# Altium PCB msr50.PcbDoc (part 1 of 8)
Units mil, origin at the board's own origin, x right, y up, seen from the top; angles counter-clockwise.
Board outline 3925 x 3925 mil, 2 copper layers (TopLayer, BottomLayer); 109 components, 122 nets, 846 pads, 52 vias.
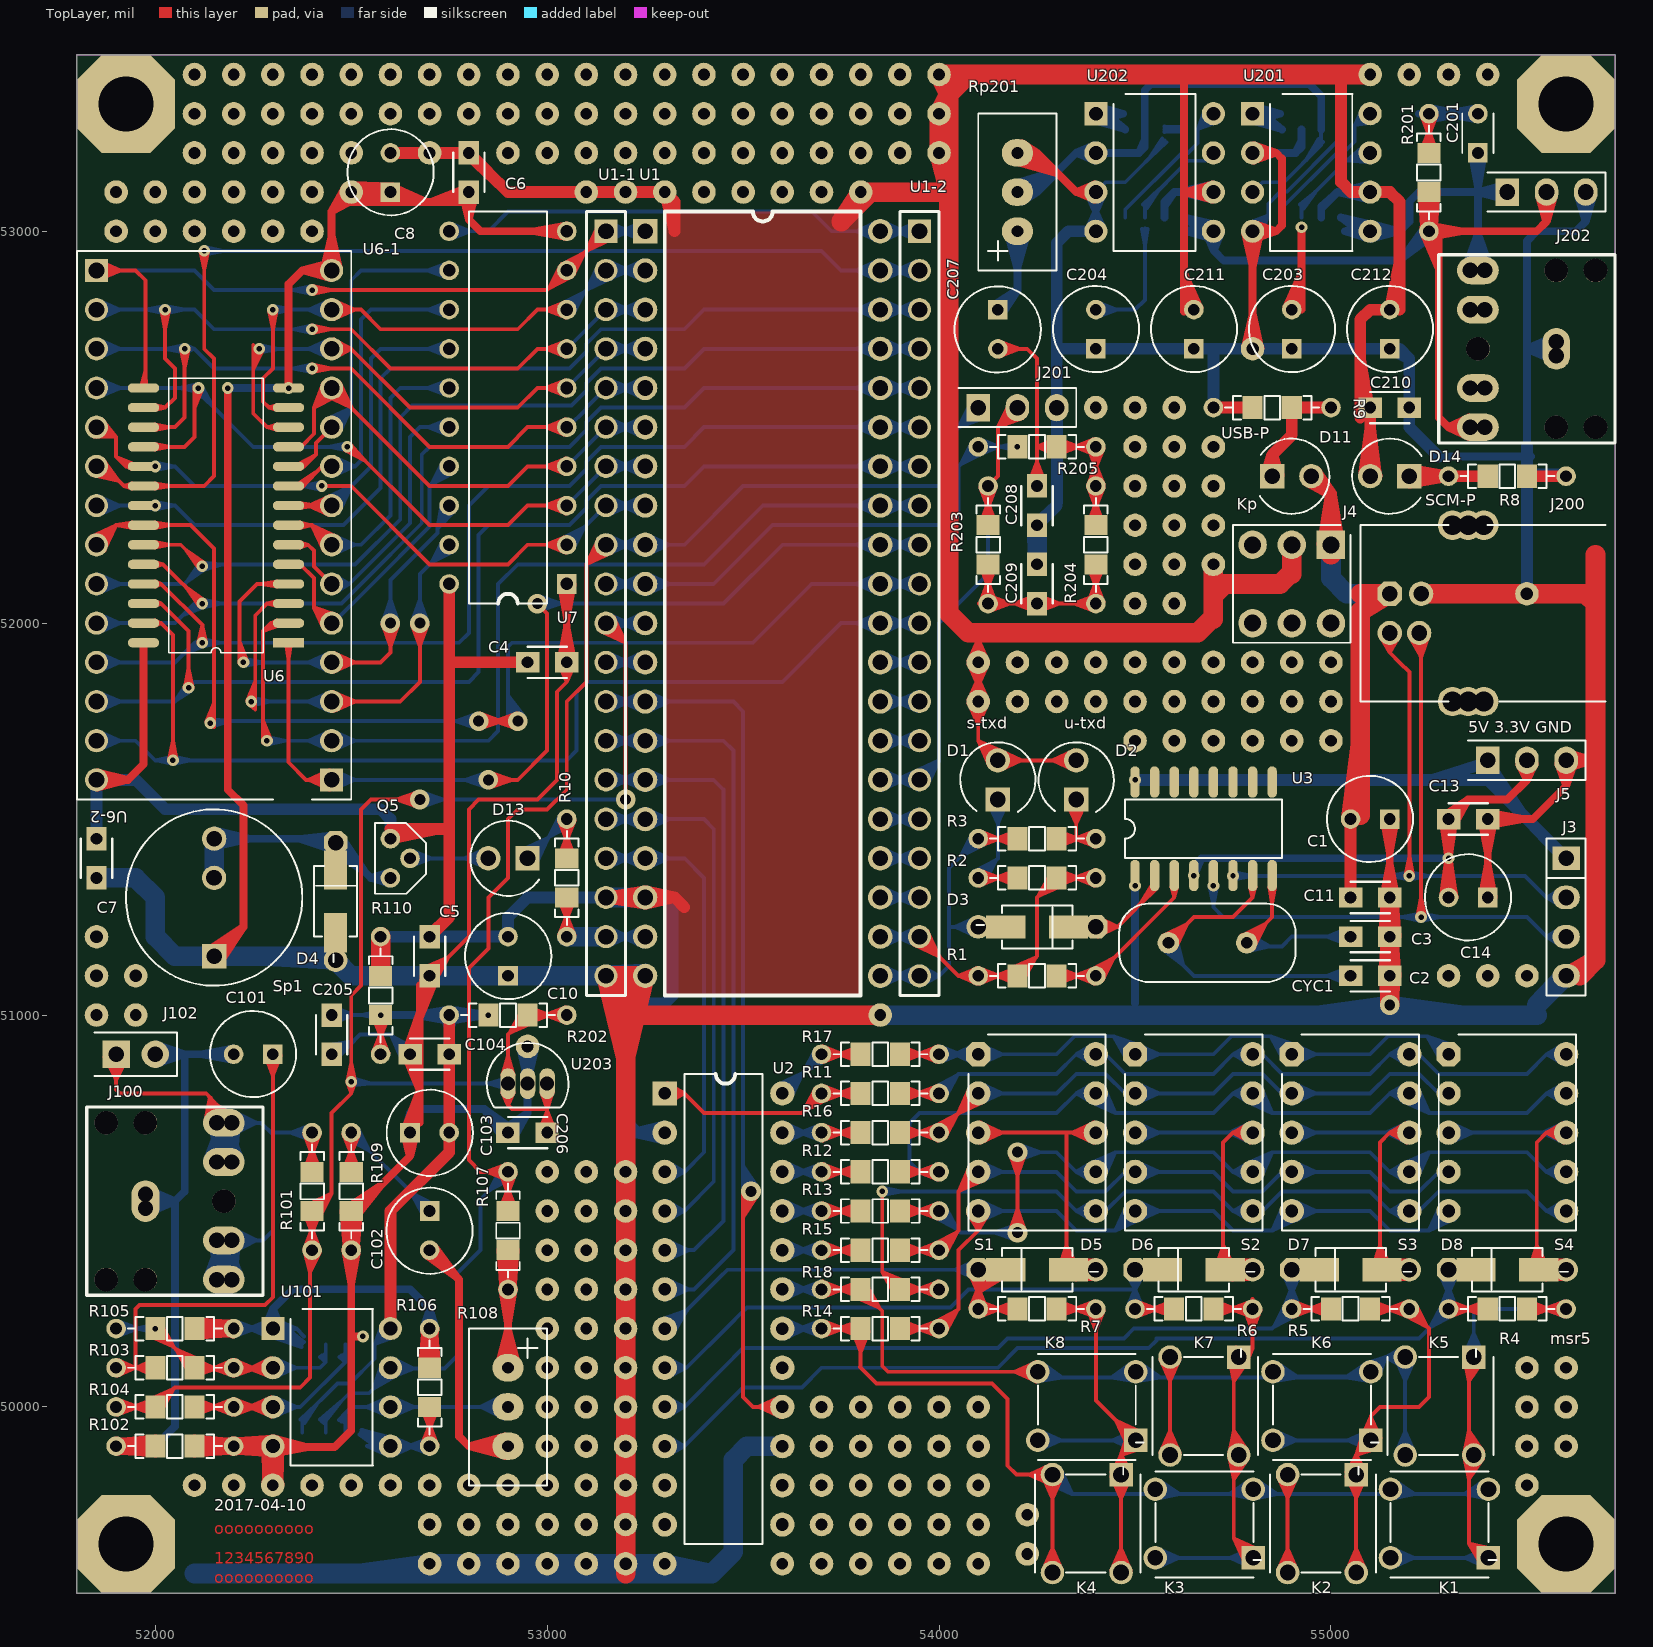
[diagram p0: TopLayer view]
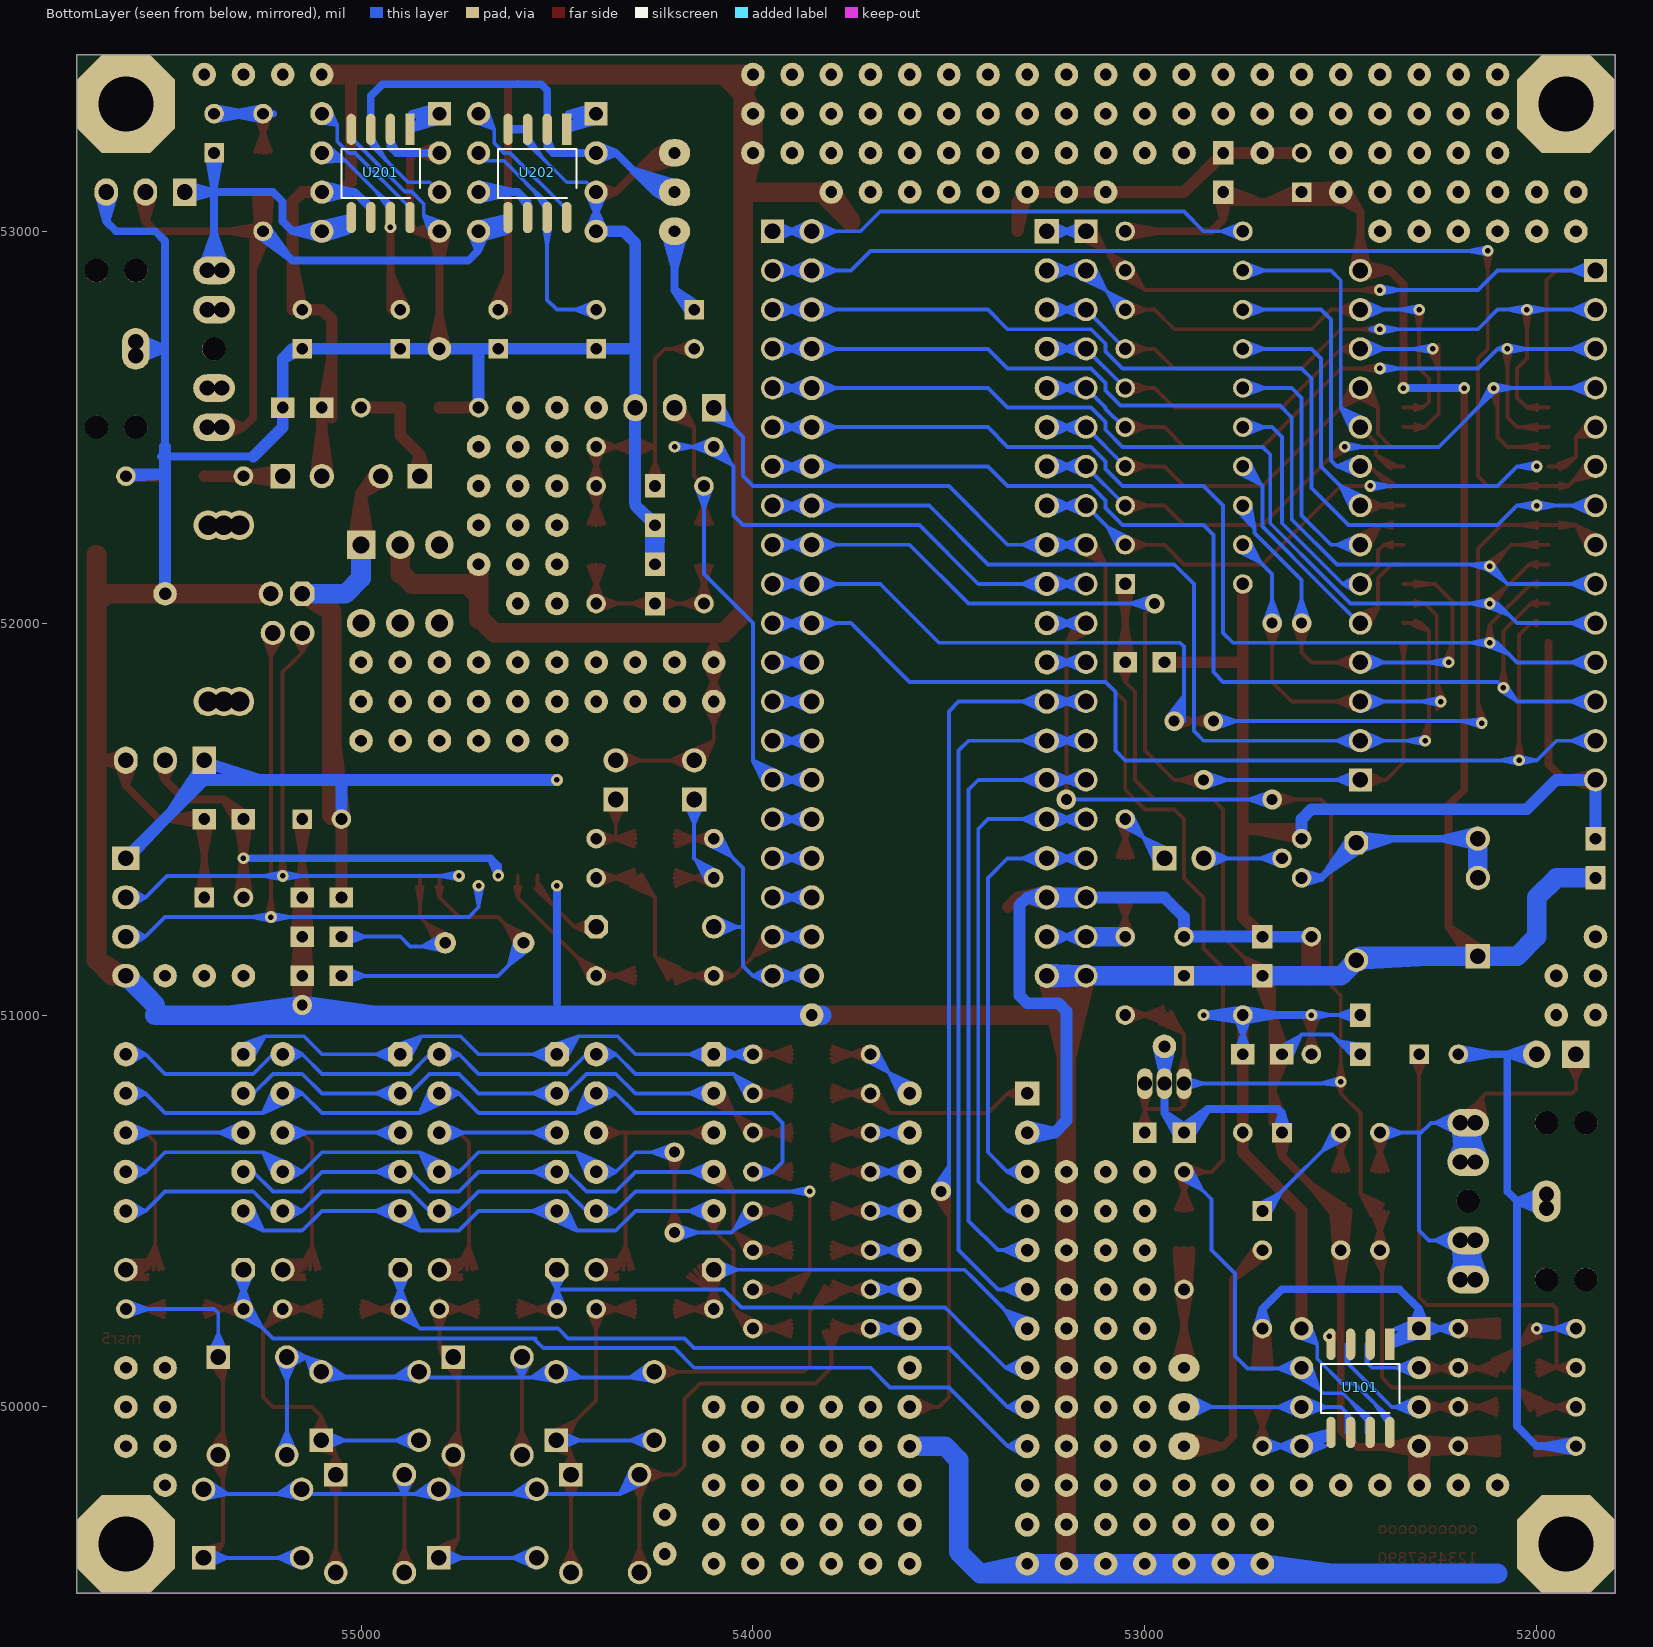
[diagram p1: BottomLayer view, seen from below]

## Layer stack, top to bottom
TopLayer: signal copper 1.4
Dielectric: dielectric 12.6, FR-4, Dk 4.8
BottomLayer: signal copper 1.4

## Board outline
51800,53450 55725,53450 55725,49525 51800,49525

## Design rules (kind name [scope] priority, off if disabled: settings)
AssemblyTestPointUsage [All] p1 off:
AssemblyTestpoint [All] p1 off: testpointundercomponent=TRUE minsize=40 maxsize=100 preferedsize=60 minholesize=0 maxholesize=40 preferedholesize=32 testpointgrid=1 usegrid=TRUE gridtolerance=0.01 allowsidetop=TRUE allowsidebottom=TRUE
Clearance [All] p1: gap=10
ComponentClearance [All] p1 off: gap=10 collisioncheckmode=3 verticalgap=10 showdistances=FALSE
DiffPairsRouting [All] p1 off: maxlimit=10 minlimit=10 mostfreqgap=10 maxuncoupledlength=500
FabricationTestPointUsage TestPointUsage [All] p1 off: valid=0 allowmultiple=FALSE
FabricationTestpoint Testpoint [All] p1 off: side=3 testpointundercomponent=TRUE minsize=40 maxsize=100 preferedsize=60 minholesize=20 maxholesize=40 preferedholesize=32 testpointgrid=1 allowsidetop=TRUE allowsidebottom=TRUE usegrid=TRUE gridtolerance=0.01
FanoutControl Fanout_BGA [IsBGA] p1 off: bgadir=Out bgaviamode=Centered fanoutstyle=Auto fanoutdirection=Alternating viagrid=1 // Fanout_BGA (Default Rule)
FanoutControl Fanout_LCC [IsLCC] p2 off: bgadir=Out bgaviamode=Centered fanoutstyle=Auto fanoutdirection=Alternating viagrid=1 // Fanout_LCC (Default Rule)
FanoutControl Fanout_SOIC [IsSOIC] p3 off: bgadir=Out bgaviamode=Centered fanoutstyle=Auto fanoutdirection=Alternating viagrid=1 // Fanout_SOIC (Default Rule)
FanoutControl Fanout_Small [(CompPinCount < 5)] p4 off: bgadir=Out bgaviamode=Centered fanoutstyle=Auto fanoutdirection=OutThenIn viagrid=1 // Fanout_Small (Default Rule)
FanoutControl Fanout_Default [All] p5 off: bgadir=Out bgaviamode=Centered fanoutstyle=Auto fanoutdirection=Alternating viagrid=1 // Fanout_Default (Default Rule)
Height [All] p1 off: minheight=0 maxheight=1000 prefheight=500
HoleToHoleClearance [All] p1 off: gap=10 allowstackedmicrovias=TRUE
LayerPairs [All] p1 off: enforce=TRUE
MinimumSolderMaskSliver [All] p1 off: minsoldermaskwidth=10
NetAntennae [All] p1 off: netantennaetolerance=0
PasteMaskExpansion [All] p1 off: expansion=0
PlaneClearance [All] p1 off: clearance=20
PlaneConnect [All] p1 off: planeconnectstyle=Relief reliefexpansion=20 reliefentries=4 reliefconductorwidth=10 reliefairgap=10
PolygonConnect [All] p1 off: connectstyle=Relief reliefconductorwidth=10 reliefentries=4 polygonreliefangle="90 Angle"
RoutingPriority [All] p1 off: routingpriority=0
RoutingVias [All] p1: holewidth=28 width=50 viastyle="Through Hole" minholewidth=28 minwidth=50 maxholewidth=28 maxwidth=50
SilkToSilkClearance [All] p1 off: silktosilkclearance=10
SilkscreenOverComponentPads [All] p1 off: minsilkscreentomaskgap=10
SolderMaskExpansion [All] p1 off: expansion=4
Width [All] p1: maxlimit=100 minlimit=10 preferedwidth=30 toplayer_prefwidth=10
Width Width_1 [All] p2 off: maxlimit=100 minlimit=10 preferedwidth=50
Width Width_2 [All] p3 off: maxlimit=100 minlimit=10 preferedwidth=30
6 further rules are at their usual default settings.

## Classes and differential pairs
component class msr502: C101 C102 C103 C104 C201 C203 C204 C205 C206 C207 C208 C209 C210 C211 C212 J100 J102 J200 J201 J202 R101 R102 R103 R104 R105 R106 R107 R108 R109 R110 R201 R202 R203 R204 R205 Rp201 U101 U201 U202 U203
component class msr501: C1 C2 C3 C4 C5 C6 C7 C8 C10 C11 C13 C14 CYC1 D1 D2 D3 D4 D5 D6 D7 D8 D11 D13 D14 J3 J4 J5 k1 k2 k3 k4 K5 K6 K7 K8 Kp Q5 R1 R2 R3 R4 R5 R6 R7 R8 R9 R10 R11 R12 R13 R14 R15 R16 R17 R18 R20 R? S1 S1_1 S2 S3 S4 S5 S6 S7 S8 Sp1 U1 U1-1 U1-2 U2 U3 U6 U6-1 U6-2 U7

## Components (designator, comment, footprint, x,y, rotation, side; value= is the part's Value field where it differs from the comment)
C1 "100u/16v" rb.1/.2 55100,51500 r0 top
C2 "CAP" CAP010805 55050,51100 r0 top
C3 "CAP" CAP010805 55050,51200 r0 top
C4 "104" CAP010805 52950,51900 r0 top
C5 "104" CAP010805 52700,51200 r270 top
C6 "104" CAP010805 52800,53200 r270 top
C7 "104" CAP010805 51850,51450 r270 top
C8 "100u/16v" rb.1/.2 52600,53150 r270 top
C10 "100u/16v" rb.1/.2 52900,51150 r270 top
C11 "104" CAP010805 55050,51300 r0 top
C13 "104" CAP010805 55300,51500 r0 top
C14 "10u/16v" rb.1/.2 55350,51300 r0 top
C101 "10u/16v" rb.1/.2 52250,50900 r0 top
C102 "10u/16v" rb.1/.2 52700,50450 r90 top
C103 "10u/16v" rb.1/.2 52700,50700 r180 top
C104 "104" CAP010805 52750,50900 r180 top
C201 "103" cap0.1 55375,53300 r270 top
C203 "10u/16v" rb.1/.2 54900,52750 r270 top
C204 "10u/16v" rb.1/.2 54400,52750 r270 top
C205 "104" CAP010805 52450,51000 r270 top
C206 "104" CAP010805 53000,50700 r180 top
C207 "10u/16v" rb.1/.2 54150,52750 r90 top
C208 "104" CAP010805 54250,52350 r270 top
C209 "104" CAP010805 54250,52050 r90 top
C210 "104" CAP010805 55100,52550 r0 top
C211 "10u/16v" rb.1/.2 54650,52750 r270 top
C212 "10u/16v" rb.1/.2 55150,52750 r270 top
CYC1 "12Mhz" cyc-rad 54784.66,51184.28 r180 top
D1 "LED" led-3 54150,51600 r270 top
D2 "LED" led-3 54350,51600 r270 top
D3 "sma03" smc03 54400,51225 r180 top
D4 "sma03" smc03 52460.08,51439.92 r270 top
D5 "sma03" smc03 54100,50350 r0 top
D6 "sma03" smc03 54500,50350 r0 top
D7 "sma03" smc03 54900,50350 r0 top
D8 "sma03" smc03 55300,50350 r0 top
D11 "LED" led-3 54900,52375 r180 top
D13 "LED" led-3 52900,51400 r0 top
D14 "LED" led-3 55150,52375 r0 top
J3 "USB-a" SIP4 55600,51300 r270 top
J4 "" USB_b 55150,52075 r90 top
J5 "CON3" SIP3 55500,51650 r0 top
J100 "Phonejack Stereo SW" ST-3150-5N 51725,50525 r90 top
J102 "pow" PIN2 51900,50900 r0 top (schematic designator J101)
J200 "Phonejack Stereo SW" ST-3150-5N 55825,52700 r270 top
J201 "CON3" SIP3 54200,52550 r0 top
J202 "CON3" SIP3 55550,53100 r0 top
K1 "6-6-5" pb6_6 55276.88,49702.38 r180 top
K2 "6-6-5" pb6_6 54976.88,49702.38 r270 top
K3 "6-6-5" pb6_6 54676.88,49702.38 r180 top
K4 "6-6-5" pb6_6 54376.88,49702.38 r270 top
K5 "6-6-5" pb6_6 55276.88,50002.38 r270 top
K6 "6-6-5" pb6_6 54976.88,50002.38 r180 top
K7 "6-6-5" pb6_6 54676.88,50002.38 r270 top
K8 "6-6-5" pb6_6 54376.88,50002.38 r180 top
Kp "SW-DPDT" DPDT-6 54900,52100 r270 top
Q5 "8550" to-92a 52600,51450 r270 top
R1 "Res2" a038050 54400,51100 r180 top
R2 "Res2" a038050 54400,51350 r180 top
R3 "Res2" a038050 54100,51450 r0 top
R4 "Res2" a038050 55600,50250 r180 top
R5 "Res2" a038050 55200,50250 r180 top
R6 "Res2" a038050 54800,50250 r180 top
R7 "Res2" a038050 54400,50250 r180 top
R8 "Res2" a038050 55600,52375 r180 top
R9 "Res2" a038050 54700,52550 r0 top
R10 "Res2" a038050 53050,51200 r90 top
R11 "Res2" a038050 54000,50800 r180 top
R12 "Res2" a038050 54000,50600 r180 top
R13 "Res2" a038050 54000,50500 r180 top
R14 "Res2" a038050 54000,50200 r180 top
R15 "Res2" a038050 54000,50400 r180 top
R16 "Res2" a038050 54000,50700 r180 top
R17 "Res2" a038050 54000,50900 r180 top
R18 "Res2" a038050 54000,50300 r180 top
R101 "Res2" a038050 52400,50700 r270 top
R102 "Res2" a038050 51900,49900 r0 top
R103 "Res2" a038050 52200,50100 r180 top
R104 "Res2" a038050 52200,50000 r180 top
R105 "Res2" a038050 51900,50200 r0 top
R106 "Res2" a038050 52700,50200 r270 top
R107 "Res2" a038050 52900,50300 r90 top
R108 "10k" VR3296-1 52900,50000 r90 top
R109 "Res2" a038050 52500,50400 r90 top
R110 "Res2" a038050 52575,50900 r90 top
R201 "Res2" a038050 55250,53000 r90 top
R202 "Res2" a038050 52750,51000 r0 top
R203 "Res2" a038050 54125,52350 r270 top
R204 "Res2" a038050 54400,52050 r90 top
R205 "Res2" a038050 54400,52450 r180 top
Rp201 "10k" VR3296-1 54200,53100 r270 top
S1 "3911AH" LED10s 54100,50900 r0 top
S2 "3911AH" LED10s 54500,50900 r0 top
S3 "3911AH" LED10s 54900,50900 r0 top
S4 "3911AH" LED10s 55300,50900 r0 top
Sp1 "SPEAKER" sp0.23 52150,51150 r90 top
U1 "单片机IAP15F2K61S2" DIP40 53250,53000 r0 top
U1-1 "Header 20" HDR1X20 53150,53000 r270 top
U1-2 "Header 20" HDR1X20 53950,53000 r270 top
U2 "CH451" dip24 53300,50800 r0 top
U3 "CH340G" SOP-16 54475,51475 r0 top
U6 "62256" 62256 52275,51925 r180 top
U6-1 "Header 14" HDR1X14C 52450,51600 r90 top
U6-2 "Header 14" HDR1X14C 51850,52900 r270 top
U7 "DM74LS573N" DIP20 53050,52100 r180 top
U101 "TLC2252" DS-8 52450,50050 r0 top
U201 "LM386ds" DS-8 54950,53150 r0 top
U202 "LM386ds" DS-8 54550,53150 r0 top
U203 "TL431AILP" 29-04 52950,50825 r270 top

## Footprints (in the part's own frame and the unit in brackets; to place one, negate y for a bottom-side part, rotate by r counter-clockwise, add the part's x,y. Pads: shape width x height; smd on the part's side, far side on the other; paste and mask are expansions set on the pad)
29-04 [mm] "TO, Flat Index; 3 In-Line, Axial Leads; Body Dia. 4.8mm; Leads 0.48 x 0.51 mm (max)"
  oval 2x1 hole 0.9: 1(0,-1.27) 2(0,0) 3(0,1.27)
  silkscreen extent -2.65,-2.65 1.55,2.65
62256 [mil]
  rect 80x23.62 smd: 1(-65,-25)
  oval 80x23.62 smd: 2(-65,-75) 3(-65,-125) 4(-65,-175) 5(-65,-225) 6(-65,-275) 7(-65,-325) 8(-65,-375) 9(-65,-425) 10(-65,-475) 11(-65,-525) 12(-65,-575) 13(-65,-625) 14(-65,-675) 15(305.08,-675) 16(305.08,-625) 17(305.08,-575) 18(305.08,-525) 19(305.08,-475) 20(305.08,-425) 21(305.08,-375) 22(305.08,-325) 23(305.08,-275) 24(305.08,-225) 25(305.08,-175) 26(305.08,-125) 27(305.08,-75) 28(305.08,-25)
  silkscreen extent -1,-700 241,0
a038050 [mm]
  round 1.27 hole 0.762: 1(0,0) 2(7.62,0)
  rect 1.3x1.5 smd: 3(2.54,0) 4(5.08,0)
  silkscreen extent 0.76,-0.76 6.86,0.76
cap0.1 [mil]
  round 50 hole 30: 1(0,0)
  rect 50x50 hole 30: 2(100,0)
  silkscreen extent 0,-40 100,40
CAP010805 [mil] "0.1&0805"
  rect 60x52 hole 30: 1(0,0) 2(100,0)
  silkscreen extent 0,-40 100,40
cyc-rad [mil]
  round 55 hole 30: 1(-0.45,-0.07) 2(199.55,-0.07)
  silkscreen extent -125,-100 325,100
DIP20 [mil]
  rect 50x50 hole 32: 1(0,0)
  round 50 hole 32: 2(0,-100) 3(0,-200) 4(0,-300) 5(0,-400) 6(0,-500) 7(0,-600) 8(0,-700) 9(0,-800) 10(0,-900) 11(300,-900) 12(300,-800) 13(300,-700) 14(300,-600) 15(300,-500) 16(300,-400) 17(300,-300) 18(300,-200) 19(300,-100) 20(300,0)
  silkscreen extent 50,-950 250,50
dip24 [mil]
  rect 62x62 hole 32: 1(0,0)
  round 62 hole 32: 2(0,-100) 3(0,-200) 4(0,-300) 5(0,-400) 6(0,-500) 7(0,-600) 8(0,-700) 9(0,-800) 10(0,-900) 11(0,-1000) 12(0,-1100) 13(300,-1100) 14(300,-1000) 15(300,-900) 16(300,-800) 17(300,-700) 18(300,-600) 19(300,-500) 20(300,-400) 21(300,-300) 22(300,-200) 23(300,-100) 24(300,0)
  silkscreen extent 50,-1150 250,50
DIP40 [mil]
  rect 62x62 hole 40: 1(0,0)
  round 62 hole 40: 2(0,-100) 3(0,-200) 4(0,-300) 5(0,-400) 6(0,-500) 7(0,-600) 8(0,-700) 9(0,-800) 10(0,-900) 11(0,-1000) 12(0,-1100) 13(0,-1200) 14(0,-1300) 15(0,-1400) 16(0,-1500) 17(0,-1600) 18(0,-1700) 19(0,-1800) 20(0,-1900) 21(600,-1900) 22(600,-1800) 23(600,-1700) 24(600,-1600) 25(600,-1500) 26(600,-1400) 27(600,-1300) 28(600,-1200) 29(600,-1100) 30(600,-1000) 31(600,-900) 32(600,-800) 33(600,-700) 34(600,-600) 35(600,-500) 36(600,-400) 37(600,-300) 38(600,-200) 39(600,-100) 40(600,0)
  silkscreen extent 50,-1950 550,50
DPDT-6 [mm] "Double-Pole, Double-Throw Switch; 6 Leads"
  rect 1.85x1.85 hole 1.1: 1(-2.54,2.54)
  round 1.85 hole 1.1: 2(-2.54,0) 3(-2.54,-2.54) 4(2.54,-2.54) 5(2.54,0) 6(2.54,2.54)
  silkscreen extent -3.81,-3.81 3.81,3.81
DS-8 [mil] "dip8&so8"
  rect 59.05x59.05 hole 35.43: 1(-150,150)
  round 59.05 hole 35.43: 2(-150,50) 3(-150,-50) 4(-150,-150) 5(150,-150) 6(150,-50) 7(150,50) 8(150,150)
  rect 24x80 smd far side: 11(-75,110)
  oval 24x80 smd far side: 12(-25,110) 13(25,110) 14(75,110) 15(75,-115) 16(25,-115) 17(-25,-115) 18(-75,-115)
  BottomLayer lines w1.97: -160,-145 -160,-130
  silkscreen extent -105,-200 105,200
HDR1X14C [mm] "Connector; Header; 14Position"
  rect 1.5x1.5 hole 1.016: 1(0,0)
  round 1.5 hole 1.016: 2(2.54,0) 3(5.08,0) 4(7.62,0) 5(10.16,0) 6(12.7,0) 7(15.24,0) 8(17.78,0) 9(20.32,0) 10(22.86,0) 11(25.4,0) 12(27.94,0) 13(30.48,0) 14(33.02,0)
  silkscreen extent -1.27,-1.27 34.29,1.27
HDR1X20 [mm] "Connector; Header; 20 Position"
  rect 1.5x1.5 hole 1.016: 1(0,0)
  round 1.5 hole 1.016: 2(2.54,0) 3(5.08,0) 4(7.62,0) 5(10.16,0) 6(12.7,0) 7(15.24,0) 8(17.78,0) 9(20.32,0) 10(22.86,0) 11(25.4,0) 12(27.94,0) 13(30.48,0) 14(33.02,0) 15(35.56,0) 16(38.1,0) 17(40.64,0) 18(43.18,0) 19(45.72,0) 20(48.26,0)
  silkscreen extent -1.27,-1.27 49.53,1.27
LED10s [mil]
  oct 62x62 hole 32: 1(0,0)
  round 62 hole 32: 2(0,-100) 3(0,-200) 4(0,-300) 5(0,-400) 6(300,-400) 7(300,-300) 8(300,-200) 9(300,-100) 10(300,0)
  silkscreen extent -25,-450 325,50
led-3 [mil]
  round 62 hole 40: 1(-50,0)
  rect 62x62 hole 40: 2(50,0)
  silkscreen extent -96,-96 81,96
pb6_6 [mil] "button"
  rect 60x60 hole 40: 1(-125,87.5)
  round 60 hole 40: 2(-125,-87.5) 3(125,-87.5) 4(125,87.5)
  silkscreen extent -145,-133 125,138
PIN2 [mil] "Photosensitive Diode; 2 Leads"
  rect 70x70 hole 40: 1(0,0)
  round 70 hole 40: 2(100,0)
  silkscreen extent -55,-55 155,55
rb.1/.2 [mil]
  rect 50x50 hole 30: 1(50,0)
  round 50 hole 30: 2(-50,0)
  silkscreen extent -110,-110 110,110
SIP3 [mil]
  rect 60x70 hole 40: 1(-100,0)
  oval 60x70 hole 40: 2(0,0) 3(100,0)
  silkscreen extent -150,-50 150,50
SIP4 [mil]
  rect 60x70 hole 40: 1(-100,0)
  oval 60x70 hole 40: 2(0,0) 3(100,0) 4(200,0)
  silkscreen extent -150,-50 250,50
smc03 [mil]
  oct 60x60 hole 40: 1(0,0)
  round 60 hole 40: 2(300,0)
  rect 100x59.06 smd: 3(70,0) 4(230,0)
  silkscreen extent 60,-55 305,55
SOP-16 [mil] "Small Outline; 16 Leads; Body Width 5.6 mm; Pitch 1.27 mm"
  oval 24x80 smd: 1(25,-119) 2(75,-119) 3(125,-119) 4(175,-119) 5(225,-119) 6(275,-119) 7(325,-119) 8(375,-119) 9(375,119.5) 10(325,119.5) 11(275,119.5) 12(225,119.5) 13(175,119.5) 14(125,119.5) 15(75,119.5) 16(25,119.5)
  silkscreen extent 0,-75 400,75
sp0.23 [mil] "speak sip2-sip3"
  rect 62x62 hole 40: 1(0.09,-0.33)
  round 62 hole 40: 2(200,0) 3(300.09,-0.33)
  silkscreen extent -75,-225 375,225
ST-3150-5N [mm] "Connector; Stereo Jack, 3.5mm, 5 Position"
  round 1.524 hole 1.524: 0(-5.08,-3.81) 0(-5.08,-6.35) 0(0,-11.43) 0(5.08,-3.81) 0(5.08,-6.35)
  oval 2.7x1.8 all layers, no hole: 1(0,-6.35)
  round 1.2 hole 1: 1A(-0.45,-6.35) 1B(0.45,-6.35) 2A(5.08,-11.938) 2B(5.08,-10.98) 3A(2.54,-11.938) 3B(2.54,-10.98) 4A(-2.54,-11.938) 4B(-2.54,-10.98) 5A(-5.08,-11.938) 5B(-5.08,-10.98)
  oval 1.8x2.7 all layers, no hole: 2(5.08,-11.43) 3(2.54,-11.43) 4(-2.54,-11.43) 5(-5.08,-11.43)
  silkscreen extent -6.1,-13.97 6.1,-2.54
to-92a [mil]
  round 50 hole 30: 1(0,0) 2(50,50) 3(100,0)
  silkscreen extent -39,-40 141,90
USB_b [mil] "Connector; USB, Type A"
  oct 62x62 hole 40: 1(0,0)
  round 62 hole 40: 2(-100,0) 3(-100,-75) 4(0,-80)
  round 75 hole 50: 5(-275,-240) 5(-275,-200) 5(-275,-160) 6(175,-200) 6(175,-160) 6(175,-240)
  silkscreen extent -275,-550 175,75
VR3296-1 [mil]
  oval 70x80 hole 30: 1(-100,0) 2(0,0) 3(100,0)
  silkscreen extent -200,-100 200,100

## Part data
C1 C8 C10 C14 C101 C102 C103 C203 C204 C207 C211 C212: library part ELECTRO1, "Electrolytic Capacitor"
C4 C5 C6 C7 C11 C13 C104 C201 C205 C206 C208 C209 C210: library part CAP, "Capacitor"
CYC1: library part CRYSTAL, "Crystal"
J3 J4: library part CON4, "Connector"
J5 J201 J202: "Connector"
J100 J200: "3-Conductor Jack with 2 break contacts (normals) and 2 auxiliary make contacts"
J102: library part Mic1, "Microphone"
K1 K2 K3 K4 K5 K6 K7 K8: library part SW-PB2
Kp: "Double-Pole, Double-Throw Switch"
Q5: library part PNP
R1 R2 R3 R4 R5 R6 R7 R8 R9 R10 R11 R12 R13 R14 R15 R16 R17 R18 R101 R102 R103 R104 R105 R106 R107 R109 R110 R201 R202 R203 R204 R205: library part Res22, "Resistor"
R108 Rp201: library part RES3, "3296"
S1 S2 S3 S4: library part DS1
Sp1: "SPEAKER sip0.2/0.3"
U1: library part Component_3
U1-1 U1-2: "Header, 20-Pin"
U6-1 U6-2: "Header, 14-Pin"
U7: "Octal D Latch with 3-State Output"
U101: library part LM358ds, "Dual Low-Power Operational Amplifier"
U201 U202: "Low Voltage Audio Power Amplifier"
U203: "Programmable Precision Reference"

## Free pads (board coordinates)
  round 60 hole 30: 0(53200,50600) 0(53700,50000) 0(53850,51000) 0(55300,51100) 1(52950,50920) 1(53200,50500) 1(53700,49900) 1(55400,51100) 2(53200,50400) 2(53700,49800) 2(53800,49900) 2(54400,52550) 2(55500,51100) 3(53200,50300) 3(53700,49700) 3(53800,50000) 3(54500,52550) 4(53200,50200) 4(53800,49800) 4(54600,52550) 5(53200,50100) 5(53800,49700) 5(54500,52450) 6(53200,50000) 6(53800,49600) 6(54600,52450) 7(53200,49900) 7(53700,49600) 7(54700,52450) 8(53200,49800) 8(53600,49600) 8(54700,52350) 9(53200,49700) 9(54700,52250) 10(53300,49600) 10(53900,50000) 10(54600,52250) 11(53900,49900) 11(54500,52150) 12(53900,49800) 12(54600,52150) 13(52900,53200) 13(54700,52150) 14(53000,53200) 14(54500,52050) 15(53100,53200) 15(54600,52050) 16(53200,53200) 16(54700,51900) 17(53300,53200) 17(54800,51900) 18(53400,53200) 18(55000,51900) 19(53500,53200) 19(54900,51900) 20(53600,53200) 20(54600,51900) 21(53700,53200) 21(54500,51900) 22(53800,53200) 22(54400,51900) 23(53900,53200) 23(54300,51900) 24(54000,53200) 24(54200,51900) 25(53900,53300) 25(54200,51800) 26(53900,53400) 26(54300,51800) 27(53800,53400) 27(54400,51800) 28(53800,53300) 28(54500,51800) 29(54000,53300) 29(54600,51800) 30(54000,53400) 30(54500,51700) 31(53700,53400) 31(54600,51700) 32(53700,53300) 32(54700,51700) 33(53600,53300) 33(54800,51700) 34(53600,53400) 34(54900,51700) 35(53500,53400) 35(55000,51700) 36(53400,53400) 36(54100,51900) 37(53300,53400) 37(54100,51800) 38(53200,53400) 39(53100,53400) 40(53000,53400) 41(52900,53400) 42(52800,53400) 43(52700,53400) 44(52600,53400) 45(52500,53400) 46(52400,53400) 47(52300,53400) 48(52200,53400) 49(52100,53400) 50(52100,53300) 51(52200,53300) 52(52200,53200) 53(52100,53200) 54(52000,53100) 55(52100,53100) 56(51900,53100) 57(51900,53000) 58(52000,53000) 59(52100,53000) 60(52200,53000) 61(52200,53100) 62(52300,53100) 63(52300,53200) 64(52300,53300) 65(52300,53000) 66(52400,53000) 67(52400,53100) 68(52400,53200) 69(52400,53300) 70(52500,53300) 71(52500,53200) 72(52600,53300) 73(52700,53300) 74(52800,53300) 75(52700,53200) 76(52900,53300) 77(53000,53300) 78(53100,53300) 79(53200,53300) 80(53300,53300) 81(53400,53300) 82(53500,53300) 83(53400,53100) 84(53300,53100) 85(53500,53100) 86(53600,53100) 87(53700,53100) 88(53800,53100) 89(53200,53100) 90(53100,53100) 91(52500,53100) 93(55200,53400) 94(55300,53400) 95(55400,53400) 100(54600,52350) 101(54500,52250) 102(54500,52350) 103(55100,53400) 104(54700,51800) 105(54800,51800) 106(54900,51800) 107(55000,51800) 108(55500,50100) 109(55600,50100) 110(55500,50000) 111(55600,50000) 112(55600,49900) 113(55500,49900) 114(55500,49800) 115(54000,50000) 116(54100,50000) 117(54100,49900) 118(54000,49900) 119(54000,49800) 120(54100,49800) 121(54100,49700) 122(54000,49700) 123(53900,49700) 124(53900,49600) 125(54000,49600) 126(54100,49600) 127(54225,49725) 128(54225,49625) 129(53000,50600) 130(53100,50600) 131(53000,50500) 132(53100,50500) 133(53100,50400) 134(53000,50400) 135(53000,50300) 136(53100,50300) 137(53100,50200) 138(53000,50200) 139(53000,50100) 140(53100,50100) 141(53100,50000) 142(53000,50000) 143(52700,49800) 144(52700,49700) 145(52800,49700) 146(52800,49800) 147(52900,49800) 148(53000,49800) 149(53100,49800) 150(53100,49900) 151(53000,49900) 152(52900,49700) 153(53000,49700) 154(53100,49700) 155(53100,49600) 156(53000,49600) 157(52900,49600) 158(52800,49600) 159(52700,49600) 161(52200,49800) 162(52100,49800) 164(52300,49800) 165(52400,49800) 166(52500,49800) 167(52600,49800) 168(51850,51000) 171(51950,51000)
  round 60 hole 32: 0(54800,52700) 0(55500,52075) 2(53200,49600) 10(51850,51200) 11(51850,51100) 14(51950,51100)
  oct 250x250 hole 140: 1(51925,49650) 1(51925,53325) 4(55600,49650) 4(55600,53325)

## Via types
v1: diameter 30, hole 14, TopLayer to BottomLayer, 40 vias
v2: diameter 50, hole 28, TopLayer to BottomLayer, 12 vias

## Nets (pads, with @x,y where several pads share a name; then routed paths per layer and width w, separated by ;. In a path a pad name is that pad's centre, name@x,y a point inside that pad or via, vN(x,y) a via of type N, cw(c..) or ccw(c..) an arc to the next point about the centre after c; other vN are vias at no path point)
A: R11.1 R11.3 S1.10 S2.10 S3.10 S4.10 | length 4445.2
  TopLayer w10: R11.3@53900,50800 R11.1@54000,50800 53945,50800 ; R11.3@53901.01,50789.46 53955.59,50800 ; R11.3@53901.01,50810.54 53955.59,50800 ; R11.3@53903.81,50779.77 53955.59,50800 ; R11.3@53903.81,50820.23 53955.59,50800 ; R11.1@53996.36,50780.33 53945,50800 ; R11.1@53996.36,50819.67 53945,50800 ; R11.1@53999.09,50790.04 53945,50800 ; R11.1@53999.09,50809.96 53945,50800
  BottomLayer w10: R11.1@53988.19,50816.14 54046.21,50846.21 ; R11.1@53993.49,50807.59 54046.21,50846.21 ; R11.1@54000,50800 54050,50850 54300,50850 54350,50900 ; R11.1@54007.59,50793.49 54046.21,50846.21 ; R11.1@54016.14,50788.19 54046.21,50846.21 ; S1.10@54393.24,50874.89 54350,50900 ; S1.10@54393.24,50925.11 54350,50900 ; S1.10@54397.44,50884.21 54350,50900 ; S1.10@54397.44,50915.79 54350,50900 ; S1.10@54399.64,50894.01 54350,50900 ; S1.10@54399.64,50905.99 54350,50900 ; S2.10@54793.24,50874.89 54750,50900 ; S2.10@54793.24,50925.11 54750,50900 ; S2.10@54797.44,50884.21 54750,50900 ; S2.10@54797.44,50915.79 54750,50900 ; S2.10@54799.64,50894.01 54750,50900 ; S2.10@54799.64,50905.99 54750,50900 ; S4.10@55593.24,50874.89 55550,50900 ; S4.10@55593.24,50925.11 55550,50900 ; S4.10@55597.44,50884.21 55550,50900 ; S4.10@55597.44,50915.79 55550,50900 ; S4.10@55599.64,50894.01 55550,50900 ; S4.10@55599.64,50905.99 55550,50900 ; S4.10@55600,50900 55550,50900 ; 54350,50900 S1.10@54400,50900 ; 54350,50900 S1.10@54400,50900 ; S1.10@54400,50900 54425,50900 54475,50850 54700,50850 54750,50900 ; 54750,50900 S2.10@54800,50900 ; 54750,50900 S2.10@54800,50900 ; S2.10@54800,50900 54825,50900 54875,50850 55100,50850 ; 55100,50850 55150,50900 ; 55100,50850 55150,50900 ; 55150,50900 S3.10@55200,50900 ; 55150,50900 55199.64,50905.99 55150,50900 ; 55150,50900 55199.64,50894.01 55150,50900 ; 55150,50900 55197.44,50915.79 55150,50900 ; 55150,50900 55197.44,50884.21 55150,50900 ; 55150,50900 55193.24,50925.11 55150,50900 ; 55150,50900 55193.24,50874.89 55150,50900 ; 55150,50900 S3.10@55200,50900 ; 55150,50900 S3.10@55200,50900 ; 55150,50900 S3.10@55200,50900 ; S3.10@55200,50900 55225,50900 55275,50850 55500,50850 55550,50900
A0: U6-1.10 U6.10 U7.12 | length 1482.3
  TopLayer w10: U6.10@52340,52400 52380,52400 52410,52430 ; U6.10@52364.59,52405.78 52410,52430 ; U6.10@52368.19,52400 52410,52430 ; U6.10@52372.52,52394.74 52410,52430 ; U6-1.10@52450,52500 52410,52460 52410,52430
  BottomLayer w10: U6-1.10@52435.93,52520.09 52500,52550 ; U6-1.10@52440.84,52511.27 52500,52550 ; U6-1.10@52450,52500 52500,52550 ; U6-1.10@52461.27,52490.84 52500,52550 ; U6-1.10@52470.09,52485.93 52500,52550 ; U7.12@52746.36,52880.33 52695,52900 ; U7.12@52746.36,52919.67 52695,52900 ; U7.12@52749.09,52890.04 52695,52900 ; U7.12@52749.09,52909.96 52695,52900 ; U7.12@52750,52900 52525,52900 52500,52875 52500,52550
A1: U6-1.9 U6.9 U7.13 | length 1427.6
  TopLayer w10: U6.9@52340,52350 52375,52350 52425,52400 U6-1.9@52450,52400 ; U6.9@52364.16,52355.49 52409.67,52384.67 ; U6.9@52368.19,52350 52409.67,52384.67 ; U6.9@52372.88,52345.06 52409.67,52384.67
  BottomLayer w10: U6-1.9@52450,52400 52510,52400 52525,52415 52525,52775 52550,52800 U7.13@52750,52800 ; U6-1.9@52451.77,52385.58 52509.53,52400 ; U6-1.9@52451.77,52414.42 52509.53,52400 ; U6-1.9@52455.05,52376 52509.53,52400 ; U6-1.9@52455.05,52424 52509.53,52400 ; U7.13@52746.36,52780.33 52695,52800 ; U7.13@52746.36,52819.67 52695,52800 ; U7.13@52749.09,52790.04 52695,52800 ; U7.13@52749.09,52809.96 52695,52800
A2: U6-1.8 U6.8 U7.14 | length 1607.4
  TopLayer w10: U6.8@52340,52300 U6-1.8@52450,52300 ; U6.8@52368.19,52300 52410,52300 ; U6.8@52368.74,52293.21 52410,52300 ; U6.8@52368.74,52306.79 52410,52300 ; U6-1.8@52444.95,52276 52390.47,52300 ; U6-1.8@52444.95,52324 52390.47,52300 ; U6-1.8@52448.23,52285.58 52390.47,52300 ; U6-1.8@52448.23,52314.42 52390.47,52300
  BottomLayer w10: U6-1.8@52435.88,52320.05 52500.74,52350.74 ; U6-1.8@52440.82,52311.26 52500.74,52350.74 ; U6-1.8@52450,52300 52550,52400 52550,52675 52575,52700 U7.14@52750,52700 ; U6-1.8@52461.26,52290.82 52500.74,52350.74 ; U6-1.8@52470.05,52285.88 52500.74,52350.74 ; U7.14@52746.36,52680.33 52695,52700 ; U7.14@52746.36,52719.67 52695,52700 ; U7.14@52749.09,52690.04 52695,52700 ; U7.14@52749.09,52709.96 52695,52700
A3: U6-1.7 U6.7 U7.15 | length 1679.2
  TopLayer w10: U6.7@52340,52250 52400,52250 ; U6.7@52368.19,52250 52400,52250 ; U6.7@52368.92,52243.23 52400,52250 ; U6.7@52368.92,52256.77 52400,52250 ; U6-1.7@52429.91,52185.93 52400,52250 ; U6-1.7@52438.73,52190.84 52400,52250 ; U6-1.7@52459.16,52211.27 52400,52250 ; U6-1.7@52464.07,52220.09 52400,52250 ; 52400,52250 U6-1.7@52450,52200 52400,52250
  BottomLayer w10: U6-1.7@52450,52200 52525,52200 52600,52275 52600,52575 52625,52600 U7.15@52750,52600 ; U6-1.7@52451.77,52185.58 52509.53,52200 ; U6-1.7@52451.77,52214.42 52509.53,52200 ; U6-1.7@52455.05,52176 52509.53,52200 ; U6-1.7@52455.05,52224 52509.53,52200 ; U7.15@52746.36,52580.33 52695,52600 ; U7.15@52746.36,52619.67 52695,52600 ; U7.15@52749.09,52590.04 52695,52600 ; U7.15@52749.09,52609.96 52695,52600
A4: U6-1.6 U6.6 U7.16 | length 1234.8
  TopLayer w10: U6.6@52340,52200 52390,52200 ; U6.6@52368.19,52200 52390,52200 ; U6.6@52369.25,52193.27 52390,52200 ; U6.6@52369.25,52206.73 52390,52200 ; U6-1.6@52450,52100 52405,52145 52405,52185 52390,52200
  BottomLayer w10: U6-1.6@52450,52100 52495,52100 ; U6-1.6@52452.35,52085.66 52495,52100 ; U6-1.6@52452.35,52114.34 52495,52100 ; U6-1.6@52456.68,52076.4 52495,52100 ; U6-1.6@52456.68,52123.6 52495,52100 ; U7.16@52746.36,52480.33 52695,52500 ; U7.16@52746.36,52519.67 52695,52500 ; U7.16@52749.09,52490.04 52695,52500 ; U7.16@52749.09,52509.96 52695,52500 ; U7.16@52750,52500 52675,52500 52650,52475 52650,52255 52495,52100
A5: U6-1.5 U6.5 U7.17 | length 1304.7
  TopLayer w10: U6.5@52340,52150 52370,52150 52405,52115 52405,52040 ; U6-1.5@52430.31,51985.37 52405,52040 ; U6-1.5@52439.11,51990.39 52405,52040 ; U6-1.5@52458.27,52011.94 52405,52040 ; U6-1.5@52462.22,52021.27 52405,52040 ; 52405,52040 U6-1.5@52450,52000 52445,52000 52405,52040
  BottomLayer w10: U6-1.5@52450,52000 52453.28,52000 52545,52091.72 52700,52246.72 52700,52350 U7.17@52750,52400 ; U7.17@52733.86,52411.81 52703.79,52353.79 ; U7.17@52742.41,52406.51 52703.79,52353.79 ; U7.17@52756.51,52392.41 52703.79,52353.79 ; U7.17@52761.81,52383.86 52703.79,52353.79
A6: U6-1.4 U6.4 U7.18 | length 2782.9
  TopLayer w10: v1@52215.05,51899.04 52215,51951.8 ; v1@52234.59,51902.82 52215,51951.8 ; U6.4@52311.26,52093.21 52270,52100 ; U6.4@52311.26,52106.79 52270,52100 ; U6.4@52311.81,52100 52270,52100 ; U6.4@52340,52100 52260,52100 52215,52055 52215,51980 52215,51910 v1(52225,51900) 52215,51951.8 ; U6-1.4@52450,51900 52575,51900 52600,51925 v2(52600,52000) ; U6-1.4@52451.77,51885.58 52509.53,51900 ; U6-1.4@52451.77,51914.42 52509.53,51900 ; U6-1.4@52455.05,51876 52509.53,51900 ; U6-1.4@52455.05,51924 52509.53,51900 ; v2@52580.29,51996.61 52600,51941 ; v2@52590.04,51999.15 52600,51941 ; v2@52609.96,51999.15 52600,51941 ; v2@52619.71,51996.61 52600,51941
  BottomLayer w10: v1(52225,51900) U6-1.4@52450,51900 ; v1@52226.02,51890.05 52274,51900 v1@52226.02,51909.95 ; U6-1.4@52444.95,51876 52390.47,51900 ; U6-1.4@52444.95,51924 52390.47,51900 ; U6-1.4@52448.23,51885.58 52390.47,51900 ; U6-1.4@52448.23,51914.42 52390.47,51900 ; v2@52580.29,52003.39 52600,52059 ; v2@52590.04,52000.85 52600,52059 ; v2(52600,52000) 52600,52110 52720,52230 52720,52241.72 ; v2@52609.96,52000.85 52600,52059 ; v2@52619.71,52003.39 52600,52059 ; U7.18@52731.03,52306.33 52720,52241.72 ; U7.18@52740.79,52303.89 52720,52241.72 ; U7.18@52758.52,52294.76 52720,52241.72 ; U7.18@52766.18,52288.24 52720,52241.72 ; 52720,52241.72 U7.18@52750,52300 52750,52271.72 52720,52241.72
A7: U6-1.3 U6.3 U7.19 | length 2904.8
  TopLayer w10: v1@52235.42,51802.86 52255,51851.06 ; v1@52237.28,51793.64 52255,51780 ; v1@52254.72,51802.36 52255,51780 ; v1@52254.95,51799.03 52255,51851.06 ; U6.3@52310.95,52043.24 52285,52050 ; U6.3@52310.95,52056.76 52285,52050 ; U6.3@52311.81,52050 52285,52050 ; U6.3@52340,52050 52285,52050 ; U6-1.3@52450,51800 52625,51800 52675,51850 v2(52675,52000) ; U6-1.3@52451.77,51785.58 52509.53,51800 ; U6-1.3@52451.77,51814.42 52509.53,51800 ; U6-1.3@52455.05,51776 52509.53,51800 ; U6-1.3@52455.05,51824 52509.53,51800 ; v2@52655.29,51996.61 52675,51941 ; v2@52665.04,51999.15 52675,51941 ; v2@52684.96,51999.15 52675,51941 ; v2@52694.71,51996.61 52675,51941 ; 52255,51780 v1(52245,51800) 52255,51851.06 ; 52255,51780 52255,52010 52255,52020 52285,52050
  BottomLayer w10: v1@52235,51800 U6-1.3@52450,51800 ; v1(52245,51800) 52294,51800 ; v1@52246.02,51790.05 52294,51800 ; v1@52246.02,51809.95 52294,51800 ; U6-1.3@52444.95,51776 52390.47,51800 ; U6-1.3@52444.95,51824 52390.47,51800 ; U6-1.3@52448.23,51785.58 52390.47,51800 ; U6-1.3@52448.23,51814.42 52390.47,51800 ; v2@52655.29,52003.39 52675,52059 ; v2@52665.04,52000.85 52675,52059 ; v2(52675,52000) 52675,52125 U7.19@52750,52200 52703.79,52153.79 ; v2@52684.96,52000.85 52675,52059 ; v2@52694.71,52003.39 52675,52059 ; U7.19@52733.86,52211.81 52703.79,52153.79 ; U7.19@52742.41,52206.51 52703.79,52153.79 ; U7.19@52756.51,52192.41 52703.79,52153.79 ; U7.19@52761.81,52183.86 52703.79,52153.79
A8: U1-2.9 U1.32 U6-1.1 U6.1 | length 4675.1
  TopLayer w10: U6.1@52333.21,51949.45 52340,51908.19 U6.1@52346.79,51949.45 ; U6.1@52340,51950 52340,51645 52385,51600 U6-1.1@52450,51600 ; U6-1.1@52444.95,51576 52390.47,51600 ; U6-1.1@52444.95,51624 52390.47,51600 ; U6-1.1@52448.23,51585.58 52390.47,51600 ; U6-1.1@52448.23,51614.42 52390.47,51600 ; v2(52850,51600) 52925,51600 53000,51675 53000,52025 v2(52975,52050) ; v2@52850.85,51590.04 52909,51600 ; v2@52850.85,51609.96 52909,51600 ; v2@52853.39,51580.29 52909,51600 ; v2@52853.39,51619.71 52909,51600
  BottomLayer w10: U6-1.1@52450,51600 v2(52850,51600) ; U6-1.1@52451.77,51585.58 52509.53,51600 ; U6-1.1@52451.77,51614.42 52509.53,51600 ; U6-1.1@52455.05,51576 52509.53,51600 ; U6-1.1@52455.05,51624 52509.53,51600 ; v2@52846.61,51580.29 52791,51600 ; v2@52846.61,51619.71 52791,51600 ; v2@52849.15,51590.04 52791,51600 ; v2@52849.15,51609.96 52791,51600 ; v2(52975,52050) 53450,52050 53600,52200 U1.32@53850,52200 U1-2.9@53950,52200 ; v2@52975.85,52040.04 53034,52050 ; v2@52975.85,52059.96 53034,52050 ; v2@52978.39,52030.29 53034,52050 ; v2@52978.39,52069.71 53034,52050 ; U1.32@53844.46,52174.6 53789,52200 ; U1.32@53844.46,52225.4 53789,52200 ; U1.32@53847.9,52184.14 53789,52200 ; U1.32@53847.9,52215.86 53789,52200 ; U1.32@53849.7,52194.01 53789,52200 ; U1.32@53849.7,52205.99 53789,52200 ; U1.32@53850.3,52194.01 53911,52200 ; U1.32@53850.3,52205.99 53911,52200 ; U1.32@53852.1,52184.14 53911,52200 ; U1.32@53852.1,52215.86 53911,52200 ; U1.32@53855.54,52174.6 53911,52200 ; U1.32@53855.54,52225.4 53911,52200 ; U1-2.9@53944.95,52176 53890.47,52200 ; U1-2.9@53944.95,52224 53890.47,52200 ; U1-2.9@53948.23,52185.58 53890.47,52200 ; U1-2.9@53948.23,52214.42 53890.47,52200
A9: U1-2.8 U1.33 U6-1.2 U6.2 | length 4417.5
  TopLayer w10: v1@52275,51695 52275,51980 ; v1@52275.05,51699.02 52275,51750.75 ; v1(52285,51700) 52275,51750.75 ; v1@52294.58,51702.87 52275,51750.75 ; U6.2@52308.08,52005.7 52275,51980 ; U6.2@52314.57,51993.77 52275,51980 ; U6.2@52340,52000 52295,52000 ; 52275,51980 U6.2@52311.81,52000 ; 52275,51980 52295,52000 ; 52295,52000 U6.2@52311.81,52000 ; 52295,52000 52310.43,52006.67 52295,52000 ; 52295,52000 52310.43,51993.33 52295,52000 ; 52295,52000 U6.2@52311.81,52000
  BottomLayer w10: v1(52285,51700) U6-1.2@52450,51700 52850,51700 52875,51725 52875,52100 52925,52150 53400,52150 53550,52300 U1.33@53850,52300 U1-2.8@53950,52300 ; v1@52286.02,51690.05 52334,51700 v1@52286.02,51709.95 ; U6-1.2@52444.95,51676 52390.47,51700 ; U6-1.2@52444.95,51724 52390.47,51700 ; U6-1.2@52448.23,51685.58 52390.47,51700 ; U6-1.2@52448.23,51714.42 52390.47,51700 ; U6-1.2@52451.77,51685.58 52509.53,51700 ; U6-1.2@52451.77,51714.42 52509.53,51700 ; U6-1.2@52455.05,51676 52509.53,51700 ; U6-1.2@52455.05,51724 52509.53,51700 ; U1.33@53844.46,52274.6 53789,52300 ; U1.33@53844.46,52325.4 53789,52300 ; U1.33@53847.9,52284.14 53789,52300 ; U1.33@53847.9,52315.86 53789,52300 ; U1.33@53849.7,52294.01 53789,52300 ; U1.33@53849.7,52305.99 53789,52300 ; U1.33@53850.3,52294.01 53911,52300 ; U1.33@53850.3,52305.99 53911,52300 ; U1.33@53852.1,52284.14 53911,52300 ; U1.33@53852.1,52315.86 53911,52300 ; U1.33@53855.54,52274.6 53911,52300 ; U1.33@53855.54,52325.4 53911,52300 ; U1-2.8@53944.95,52276 53890.47,52300 ; U1-2.8@53944.95,52324 53890.47,52300 ; U1-2.8@53948.23,52285.58 53890.47,52300 ; U1-2.8@53948.23,52314.42 53890.47,52300
A10: U1-2.7 U1.34 U6-2.12 U6.26 | length 4359.5
  TopLayer w10: U6.26@51969.92,52050 52015,52050 ; U6.26@51998.11,52050 52015,52050 ; U6.26@51999.48,52043.33 52015,52050 ; U6.26@51999.48,52056.67 52015,52050 ; v1@52075.05,51836.02 52085,51884 v1@52094.95,51836.02 ; v1(52085,51835) 52085,51980 52015,52050
  BottomLayer w10: U6-2.12@51850,51800 52050,51800 ; U6-2.12@51851.77,51785.58 51909.53,51800 ; U6-2.12@51851.77,51814.42 51909.53,51800 ; U6-2.12@51855.05,51776 51909.53,51800 ; U6-2.12@51855.05,51824 51909.53,51800 ; v1@52077.25,51841.32 52050,51800 ; v1(52085,51835) 52050,51800 ; v1@52091.32,51827.25 52050,51800 ; U1.34@53844.46,52374.6 53789,52400 ; U1.34@53844.46,52425.4 53789,52400 ; U1.34@53847.9,52384.14 53789,52400 ; U1.34@53847.9,52415.86 53789,52400 ; U1.34@53849.7,52394.01 53789,52400 ; U1.34@53849.7,52405.99 53789,52400 ; U1.34@53850.3,52394.01 53911,52400 ; U1.34@53850.3,52405.99 53911,52400 ; U1.34@53852.1,52384.14 53911,52400 ; U1.34@53852.1,52415.86 53911,52400 ; U1.34@53855.54,52374.6 53911,52400 ; U1.34@53855.54,52425.4 53911,52400 ; U1-2.7@53944.95,52376 53890.47,52400 ; U1-2.7@53944.95,52424 53890.47,52400 ; U1-2.7@53948.23,52385.58 53890.47,52400 ; U1-2.7@53948.23,52414.42 53890.47,52400 ; U1-2.7@53950,52400 U1.34@53850,52400 53399.99,52400 53349.99,52350 53137.03,52350 53100,52312.97 53100,52293.43 53056.57,52250 52850,52250 52825,52225 52825,51875 52800,51850 52100,51850 52050,51800
A11: U1-2.6 U1.35 U6-2.11 U6.25 | length 4506.9
  TopLayer w10: U6.25@51969.92,52100 52015,52100 ; U6.25@51998.11,52100 52015,52100 ; U6.25@51999.48,52093.33 52015,52100 ; U6.25@51999.48,52106.67 52015,52100 ; v1@52110.06,51951.11 52120,51995 ; v1(52120,51950) 52120,51995 ; v1@52129.94,51951.11 52120,51995 ; 52015,52100 52120,51995
  BottomLayer w10: U6-2.11@51850,51900 52050,51900 52100,51950 ; U6-2.11@51851.77,51885.58 51909.53,51900 ; U6-2.11@51851.77,51914.42 51909.53,51900 ; U6-2.11@51855.05,51876 51909.53,51900 ; U6-2.11@51855.05,51924 51909.53,51900 ; v1@52114.17,51958.12 52070.95,51920.95 ; v1@52121.02,51940.05 52169,51950 v1@52121.02,51959.95 ; v1@52124.32,51940.98 52070.95,51920.95 ; U1.35@53844.46,52474.6 53789,52500 ; U1.35@53844.46,52525.4 53789,52500 ; U1.35@53847.9,52484.14 53789,52500 ; U1.35@53847.9,52515.86 53789,52500 ; U1.35@53849.7,52494.01 53789,52500 ; U1.35@53849.7,52505.99 53789,52500 ; U1.35@53850.3,52494.01 53911,52500 ; U1.35@53850.3,52505.99 53911,52500 ; U1.35@53852.1,52484.14 53911,52500 ; U1.35@53852.1,52515.86 53911,52500 ; U1.35@53855.54,52474.6 53911,52500 ; U1.35@53855.54,52525.4 53911,52500 ; U1-2.6@53944.95,52476 53890.47,52500 ; U1-2.6@53944.95,52524 53890.47,52500 ; U1-2.6@53948.23,52485.58 53890.47,52500 ; U1-2.6@53948.23,52514.42 53890.47,52500 ; U1-2.6@53950,52500 U1.35@53850,52500 53400,52500 53350,52450 53137.03,52450 53100,52412.97 53100,52393.43 53056.57,52350 52850,52350 52800,52300 52800,51975 52775,51950 52100,51950 ; 52070.95,51920.95 v1(52120,51950) 52100,51950 ; 52100,51950 52117.5,51959.68 52100,51950 ; 52100,51950 52117.5,51940.32 52100,51950
A12: U1-2.5 U1.36 U6-2.10 U6.24 | length 4467.5
  TopLayer w10: U6.24@51969.92,52150 52020,52150 ; U6.24@51998.11,52150 52020,52150 ; U6.24@51999.17,52143.27 52020,52150 ; U6.24@51999.17,52156.73 52020,52150 ; v1@52112.33,52043.58 52079.79,52090.21 ; v1@52126.42,52057.67 52079.79,52090.21 ; 52020,52150 v1(52120,52050) 52079.79,52090.21
  BottomLayer w10: U6-2.10@51850,52000 52050,52000 52100,52050 ; U6-2.10@51851.77,51985.58 51909.53,52000 ; U6-2.10@51851.77,52014.42 51909.53,52000 ; U6-2.10@51855.05,51976 51909.53,52000 ; U6-2.10@51855.05,52024 51909.53,52000 ; v1@52114.17,52058.12 52070.95,52020.95 ; v1@52121.02,52040.05 52169,52050 v1@52121.02,52059.95 ; v1@52124.32,52040.98 52070.95,52020.95 ; U1.36@53844.46,52574.6 53789,52600 ; U1.36@53844.46,52625.4 53789,52600 ; U1.36@53847.9,52584.14 53789,52600 ; U1.36@53847.9,52615.86 53789,52600 ; U1.36@53849.7,52594.01 53789,52600 ; U1.36@53849.7,52605.99 53789,52600 ; U1.36@53850.3,52594.01 53911,52600 ; U1.36@53850.3,52605.99 53911,52600 ; U1.36@53852.1,52584.14 53911,52600 ; U1.36@53852.1,52615.86 53911,52600 ; U1.36@53855.54,52574.6 53911,52600 ; U1.36@53855.54,52625.4 53911,52600 ; U1-2.5@53944.95,52576 53890.47,52600 ; U1-2.5@53944.95,52624 53890.47,52600 ; U1-2.5@53948.23,52585.58 53890.47,52600 ; U1-2.5@53948.23,52614.42 53890.47,52600 ; U1-2.5@53950,52600 U1.36@53850,52600 53400,52600 53350,52550 53137.03,52550 53100,52512.97 53100,52493.43 53056.57,52450 52700,52450 52680,52430 52680,52255 52525,52100 52475,52050 52100,52050 ; 52070.95,52020.95 v1(52120,52050) 52100,52050 ; 52100,52050 52117.5,52059.68 52100,52050 ; 52100,52050 52117.5,52040.32 52100,52050
A13: U1-2.4 U1.37 U6-2.9 U6.23 | length 4510.1
  TopLayer w10: U6.23@51969.92,52200 52065,52200 v1(52120,52145) 52079.79,52185.21 ; U6.23@51998.11,52200 52039.92,52200 ; U6.23@51998.67,52193.21 52039.92,52200 ; U6.23@51998.67,52206.79 52039.92,52200 ; v1@52112.33,52138.58 52079.79,52185.21 ; v1@52126.42,52152.67 52079.79,52185.21
  BottomLayer w10: U6-2.9@51850,52100 52075,52100 52125,52150 52510,52150 52625,52265 52625,52525 52655,52555 53061.57,52555 53100,52593.43 53100,52612.97 53137.03,52650 53350,52650 53400,52700 U1.37@53850,52700 U1-2.4@53950,52700 ; U6-2.9@51851.77,52085.58 51909.53,52100 ; U6-2.9@51851.77,52114.42 51909.53,52100 ; U6-2.9@51855.05,52076 51909.53,52100 ; U6-2.9@51855.05,52124 51909.53,52100 ; v1@52112.33,52151.42 52079.79,52104.79 ; v1@52120,52155 52169.79,52150 ; v1@52121.99,52135.2 52169.79,52150 ; v1@52126.42,52137.33 52079.79,52104.79 ; U1.37@53844.46,52674.6 53789,52700 ; U1.37@53844.46,52725.4 53789,52700 ; U1.37@53847.9,52684.14 53789,52700 ; U1.37@53847.9,52715.86 53789,52700 ; U1.37@53849.7,52694.01 53789,52700 ; U1.37@53849.7,52705.99 53789,52700 ; U1.37@53850.3,52694.01 53911,52700 ; U1.37@53850.3,52705.99 53911,52700 ; U1.37@53852.1,52684.14 53911,52700 ; U1.37@53852.1,52715.86 53911,52700 ; U1.37@53855.54,52674.6 53911,52700 ; U1.37@53855.54,52725.4 53911,52700 ; U1-2.4@53944.95,52676 53890.47,52700 ; U1-2.4@53944.95,52724 53890.47,52700 ; U1-2.4@53948.23,52685.58 53890.47,52700 ; U1-2.4@53948.23,52714.42 53890.47,52700 ; 52079.79,52104.79 v1(52120,52145) 52169.79,52150
A14: U1-2.3 U1.38 U6-2.7 U6.21 | length 3928.2
  BottomLayer w10: U6-2.7@51850,52300 52050,52300 52100,52250 52480,52250 52575,52345 52575,52625 52600,52650 53056.57,52650 53100,52693.43 53100,52712.97 53137.03,52750 53350,52750 53400,52800 U1.38@53850,52800 U1-2.3@53950,52800 ; U6-2.7@51851.77,52285.58 51909.53,52300 ; U6-2.7@51851.77,52314.42 51909.53,52300 ; U6-2.7@51855.05,52276 51909.53,52300 ; U6-2.7@51855.05,52324 51909.53,52300 ; v1@51998.98,52290.05 51951,52300 v1@51998.98,52309.95 ; v1@52001.02,52290.05 52049,52300 v1@52001.02,52309.95 ; U1.38@53844.46,52774.6 53789,52800 ; U1.38@53844.46,52825.4 53789,52800 ; U1.38@53847.9,52784.14 53789,52800 ; U1.38@53847.9,52815.86 53789,52800 ; U1.38@53849.7,52794.01 53789,52800 ; U1.38@53849.7,52805.99 53789,52800 ; U1.38@53850.3,52794.01 53911,52800 ; U1.38@53850.3,52805.99 53911,52800 ; U1.38@53852.1,52784.14 53911,52800 ; U1.38@53852.1,52815.86 53911,52800 ; U1.38@53855.54,52774.6 53911,52800 ; U1.38@53855.54,52825.4 53911,52800 ; U1-2.3@53944.95,52776 53890.47,52800 ; U1-2.3@53944.95,52824 53890.47,52800 ; U1-2.3@53948.23,52785.58 53890.47,52800 ; U1-2.3@53948.23,52814.42 53890.47,52800
  other v1: 52000,52300
A15: U1-2.2 U1.39 U6-2.6 U6.20 | length 4462.6
  TopLayer w10: U6-2.6@51840.47,52377.4 51907.58,52362.42 ; U6-2.6@51843.39,52387.06 51907.58,52362.42 ; U6-2.6@51859.18,52411.26 51907.58,52362.42 ; U6-2.6@51866.85,52417.82 51907.58,52362.42 ; U6.20@51940.67,52343.27 51920,52350 ; U6.20@51940.67,52356.73 51920,52350 ; U6.20@51941.73,52350 51920,52350 ; U6.20@51998.11,52350 52039.92,52350 ; U6.20@51998.67,52343.21 52039.92,52350 ; U6.20@51998.67,52356.79 52039.92,52350 ; v1@52115.05,52948.98 52125,52901 v1@52134.95,52948.98 ; v1(52125,52950) 52125,52700 52150,52675 52150,52375 52125,52350 U6.20@51969.92,52350 51920,52350 ; 51907.58,52362.42 U6-2.6@51850,52400 51870,52400 51920,52350
  BottomLayer w10: v1(52125,52950) 53700,52950 53750,52900 U1.39@53850,52900 U1-2.2@53950,52900 ; v1@52126.02,52940.05 52174,52950 v1@52126.02,52959.95 ; U1.39@53844.46,52874.6 53789,52900 ; U1.39@53844.46,52925.4 53789,52900 ; U1.39@53847.9,52884.14 53789,52900 ; U1.39@53847.9,52915.86 53789,52900 ; U1.39@53849.7,52894.01 53789,52900 ; U1.39@53849.7,52905.99 53789,52900 ; U1.39@53850.3,52894.01 53911,52900 ; U1.39@53850.3,52905.99 53911,52900 ; U1.39@53852.1,52884.14 53911,52900 ; U1.39@53852.1,52915.86 53911,52900 ; U1.39@53855.54,52874.6 53911,52900 ; U1.39@53855.54,52925.4 53911,52900 ; U1-2.2@53944.95,52876 53890.47,52900 ; U1-2.2@53944.95,52924 53890.47,52900 ; U1-2.2@53948.23,52885.58 53890.47,52900 ; U1-2.2@53948.23,52914.42 53890.47,52900
AD0: U1-1.1 U1.1 U6-2.1 U6.15 U7.9 | length 4203.4
  TopLayer w10: U6-2.1@51850,52900 51950,52900 51975,52875 U6.15@51975,52605.08 ; U6-2.1@51851.77,52885.58 51909.53,52900 ; U6-2.1@51851.77,52914.42 51909.53,52900 ; U6-2.1@51855.05,52876 51909.53,52900 ; U6-2.1@51855.05,52924 51909.53,52900 ; U6.15@51963.24,52601.32 51975,52643.38 ; U6.15@51969.92,52600 51975,52643.38 ; U6.15@51976.73,52599.74 51975,52643.38 ; v1@52395,52850 53000,52850 U7.9@53050,52900 U1-1.1@53150,53000 ; v1(52400,52850) 52449,52850 ; v1@52401.02,52840.05 52449,52850 ; v1@52401.02,52859.95 52449,52850 ; U7.9@53033.86,52911.81 53003.79,52853.79 ; U7.9@53038.19,52916.14 53096.21,52946.21 ; U7.9@53042.41,52906.51 53003.79,52853.79 ; U7.9@53043.49,52907.59 53096.21,52946.21 ; U7.9@53056.51,52892.41 53003.79,52853.79 ; U7.9@53057.59,52893.49 53096.21,52946.21 ; U7.9@53061.81,52883.86 53003.79,52853.79 ; U7.9@53066.14,52888.19 53096.21,52946.21 ; U1-1.1@53129.95,53014.12 53099.26,52949.26 ; U1-1.1@53138.74,53009.18 53099.26,52949.26 ; U1-1.1@53159.18,52988.74 53099.26,52949.26 ; U1-1.1@53164.12,52979.95 53099.26,52949.26
  BottomLayer w10: U6-2.1@51850,52900 52100,52900 52150,52850 v1@52395,52850 ; U6-2.1@51851.77,52885.58 51909.53,52900 ; U6-2.1@51851.77,52914.42 51909.53,52900 ; U6-2.1@51855.05,52876 51909.53,52900 ; U6-2.1@51855.05,52924 51909.53,52900 ; v1@52398.98,52840.05 52351,52850 ; v1@52398.98,52859.95 52351,52850 ; v1(52400,52850) 52351,52850 ; U1-1.1@53150,53000 U1.1@53250,53000 ; U1-1.1@53151.77,52985.58 53209.53,53000 ; U1-1.1@53151.77,53014.42 53209.53,53000 ; U1-1.1@53155.05,52976 53209.53,53000 ; U1-1.1@53155.05,53024 53209.53,53000 ; U1.1@53244.46,52974.6 53189,53000 ; U1.1@53244.46,53025.4 53189,53000 ; U1.1@53247.9,52984.14 53189,53000 ; U1.1@53247.9,53015.86 53189,53000 ; U1.1@53249.7,52994.01 53189,53000 ; U1.1@53249.7,53005.99 53189,53000
AD1: U1-1.2 U1.2 U6-1.13 U6.13 U7.8 | length 3459.6
  TopLayer w10: v1@52290.05,52798.98 52300,52751 v1@52309.95,52798.98 ; v1(52300,52800) 52300,52650 52275,52625 52275,52565 52290,52550 ; U6.13@52310.75,52543.27 52290,52550 ; U6.13@52310.75,52556.73 52290,52550 ; U6.13@52311.81,52550 52290,52550 ; U6.13@52340,52550 52290,52550 ; U6-1.13@52450,52800 52525,52800 52575,52750 52925,52750 52975,52800 U7.8@53050,52800 ; U6-1.13@52451.77,52785.58 52509.53,52800 ; U6-1.13@52451.77,52814.42 52509.53,52800 ; U6-1.13@52455.05,52776 52509.53,52800 ; U6-1.13@52455.05,52824 52509.53,52800 ; U7.8@53046.36,52780.33 52995,52800 ; U7.8@53046.36,52819.67 52995,52800 ; U7.8@53049.09,52790.04 52995,52800 ; U7.8@53049.09,52809.96 52995,52800
  BottomLayer w10: v1(52300,52800) U6-1.13@52450,52800 ; v1@52301.02,52790.05 52349,52800 v1@52301.02,52809.95 ; U6-1.13@52444.95,52776 52390.47,52800 ; U6-1.13@52444.95,52824 52390.47,52800 ; U6-1.13@52448.23,52785.58 52390.47,52800 ; U6-1.13@52448.23,52814.42 52390.47,52800 ; U7.8@53038.19,52816.14 53096.21,52846.21 ; U7.8@53043.49,52807.59 53096.21,52846.21 ; U7.8@53050,52800 U1-1.2@53150,52900 U1.2@53250,52900 ; U7.8@53057.59,52793.49 53096.21,52846.21 ; U7.8@53066.14,52788.19 53096.21,52846.21 ; U1-1.2@53129.95,52914.12 53099.26,52849.26 ; U1-1.2@53138.74,52909.18 53099.26,52849.26 ; U1-1.2@53151.77,52885.58 53209.53,52900 ; U1-1.2@53151.77,52914.42 53209.53,52900 ; U1-1.2@53155.05,52876 53209.53,52900 ; U1-1.2@53155.05,52924 53209.53,52900 ; U1-1.2@53159.18,52888.74 53099.26,52849.26 ; U1-1.2@53164.12,52879.95 53099.26,52849.26 ; U1.2@53244.46,52874.6 53189,52900 ; U1.2@53244.46,52925.4 53189,52900 ; U1.2@53247.9,52884.14 53189,52900 ; U1.2@53247.9,52915.86 53189,52900 ; U1.2@53249.7,52894.01 53189,52900 ; U1.2@53249.7,52905.99 53189,52900
AD2: U1-1.3 U1.3 U6-2.2 U6.16 U7.7 | length 3557.9
  TopLayer w10: U6.16@51969.92,52550 52025,52550 ; U6.16@51998.11,52550 52025,52550 ; U6.16@51998.97,52543.24 52025,52550 ; U6.16@51998.97,52556.76 52025,52550 ; v1@52015.05,52798.98 52025,52751 v1@52034.95,52798.98 ; v1(52025,52800) 52025,52675 52050,52650 52050,52575 52025,52550 ; v1(52400,52750) 52500,52750 52600,52650 52925,52650 52975,52700 U7.7@53050,52700 ; v1@52401.02,52740.05 52449,52750 v1@52401.02,52759.95 ; U7.7@53046.36,52680.33 52995,52700 ; U7.7@53046.36,52719.67 52995,52700 ; U7.7@53049.09,52690.04 52995,52700 ; U7.7@53049.09,52709.96 52995,52700
  BottomLayer w10: U6-2.2@51850,52800 v1(52025,52800) 52100,52800 52150,52750 52425,52750 ; U6-2.2@51851.77,52785.58 51909.53,52800 ; U6-2.2@51851.77,52814.42 51909.53,52800 ; U6-2.2@51855.05,52776 51909.53,52800 ; U6-2.2@51855.05,52824 51909.53,52800 ; v1@52023.98,52790.05 51976,52800 v1@52023.98,52809.95 ; v1@52026.02,52790.05 52074,52800 v1@52026.02,52809.95 ; v1@52398.98,52740.05 52351,52750 v1@52398.98,52759.95 ; v1@52402,52740.2 52425,52750 ; v1@52402,52759.8 52425,52750 ; U7.7@53050,52700 U1-1.3@53150,52800 U1.3@53250,52800 ; U1-1.3@53151.77,52785.58 53209.53,52800 ; U1-1.3@53151.77,52814.42 53209.53,52800 ; U1-1.3@53155.05,52776 53209.53,52800 ; U1-1.3@53155.05,52824 53209.53,52800 ; U1.3@53244.46,52774.6 53189,52800 ; U1.3@53244.46,52825.4 53189,52800 ; U1.3@53247.9,52784.14 53189,52800 ; U1.3@53247.9,52815.86 53189,52800 ; U1.3@53249.7,52794.01 53189,52800 ; U1.3@53249.7,52805.99 53189,52800
AD3: U1-1.4 U1.4 U6-1.12 U6.12 U7.6 | length 2991.5
  TopLayer w10: 52250,52710 52250,52535 52285,52500 ; v1@52255.18,52701.88 52250,52648.11 ; v1(52265,52700) 52250,52648.11 ; v1@52274.31,52696.35 52250,52648.11 ; U6.12@52310.95,52493.24 52285,52500 ; U6.12@52310.95,52506.76 52285,52500 ; U6.12@52311.81,52500 52285,52500 ; U6.12@52340,52500 52285,52500 ; U6-1.12@52450,52700 52500,52700 ; U6-1.12@52452.11,52685.63 52500,52700 ; U6-1.12@52452.11,52714.37 52500,52700 ; U6-1.12@52456.02,52676.22 52500,52700 ; U6-1.12@52456.02,52723.78 52500,52700 ; U7.6@53046.36,52580.33 52995,52600 ; U7.6@53046.36,52619.67 52995,52600 ; U7.6@53049.09,52590.04 52995,52600 ; U7.6@53049.09,52609.96 52995,52600 ; U7.6@53050,52600 52975,52600 52925,52550 52650,52550 52500,52700
  BottomLayer w10: v1(52265,52700) U6-1.12@52450,52700 ; v1@52266.02,52690.05 52314,52700 v1@52266.02,52709.95 ; U6-1.12@52444.95,52676 52390.47,52700 ; U6-1.12@52444.95,52724 52390.47,52700 ; U6-1.12@52448.23,52685.58 52390.47,52700 ; U6-1.12@52448.23,52714.42 52390.47,52700 ; U7.6@53050,52600 U1-1.4@53150,52700 U1.4@53250,52700 ; U1-1.4@53151.77,52685.58 53209.53,52700 ; U1-1.4@53151.77,52714.42 53209.53,52700 ; U1-1.4@53155.05,52676 53209.53,52700 ; U1-1.4@53155.05,52724 53209.53,52700 ; U1.4@53244.46,52674.6 53189,52700 ; U1.4@53244.46,52725.4 53189,52700 ; U1.4@53247.9,52684.14 53189,52700 ; U1.4@53247.9,52715.86 53189,52700 ; U1.4@53249.7,52694.01 53189,52700 ; U1.4@53249.7,52705.99 53189,52700